# Altium PCB BugBuster_HAT.PcbDoc (part 1 of 3)
Units mm, origin at the board's own origin, x right, y up, seen from the top; angles counter-clockwise.
Board outline 110 x 80 mm, 4 copper layers (Top Layer, Mid Layer 1, Mid Layer 2, Bottom Layer), stack 1.17 mm thick; 116 components, 99 nets, 522 pads, 1540 vias.
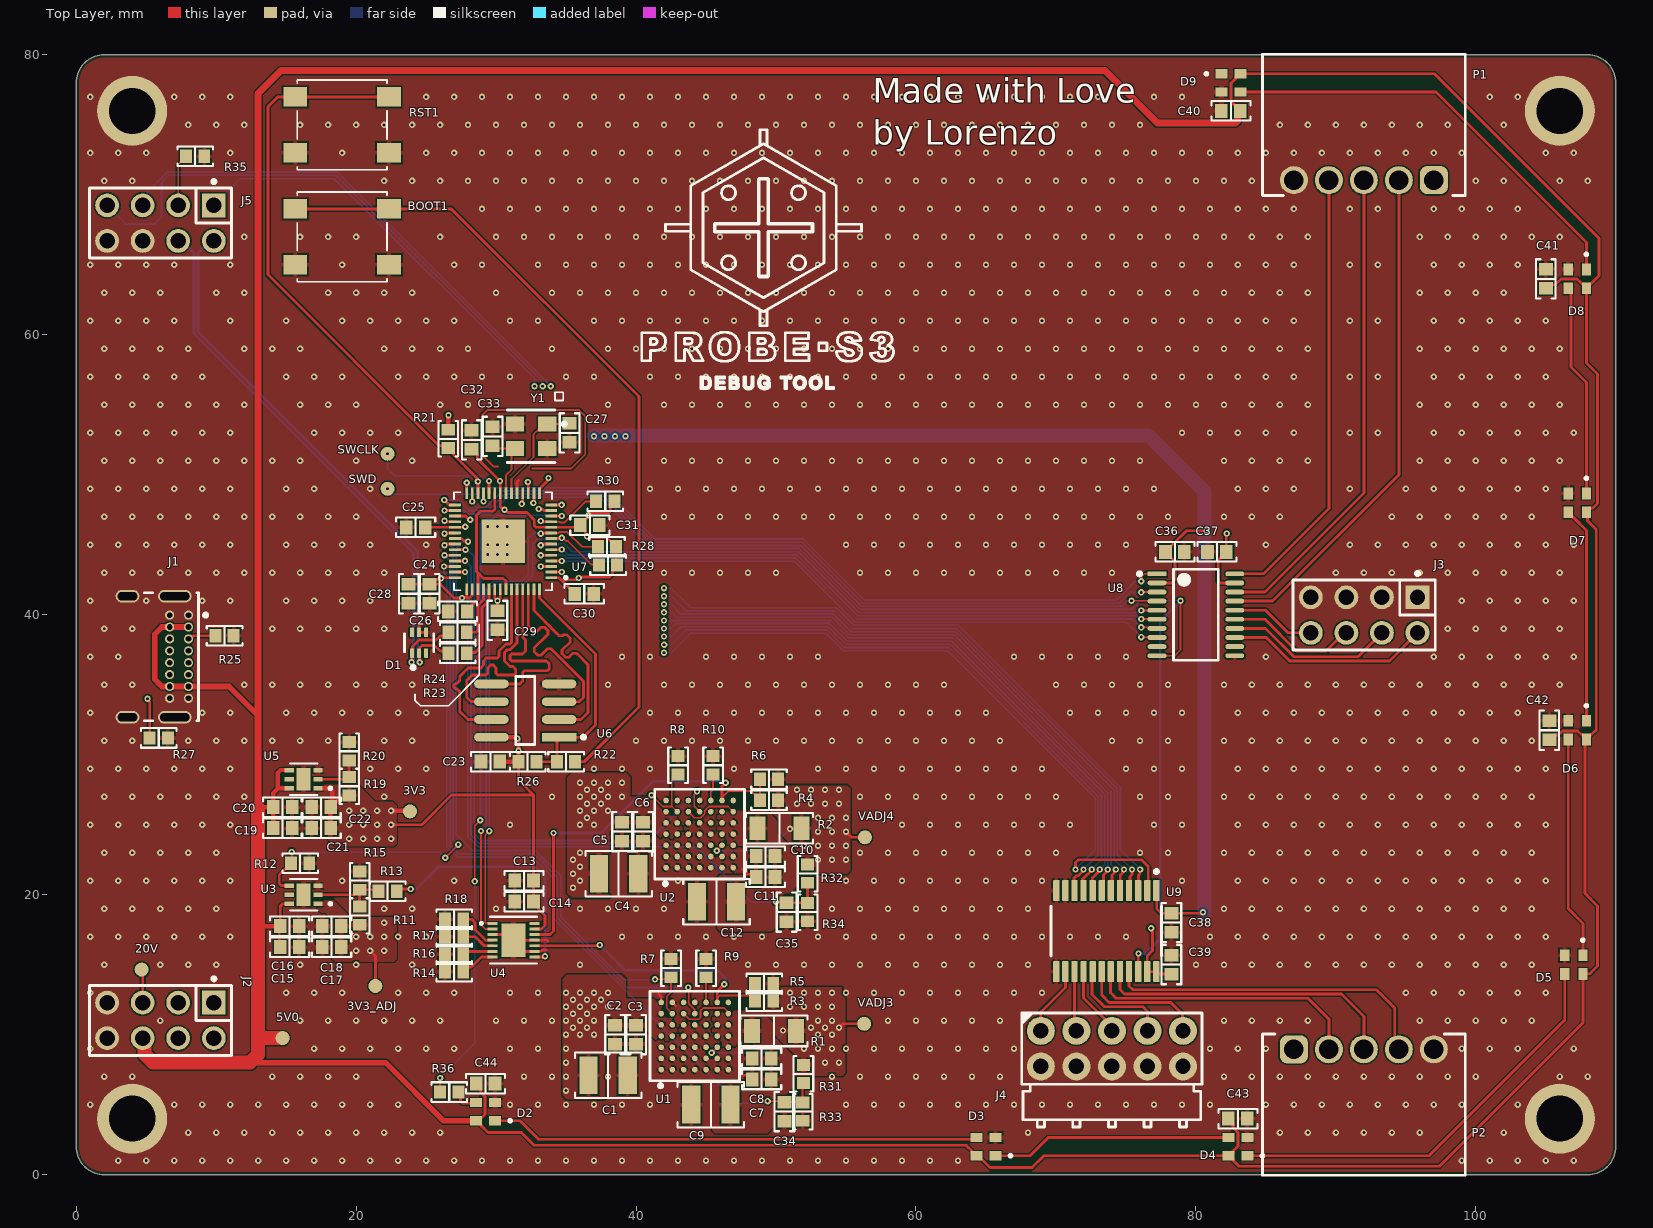
[diagram p0: Top Layer view]
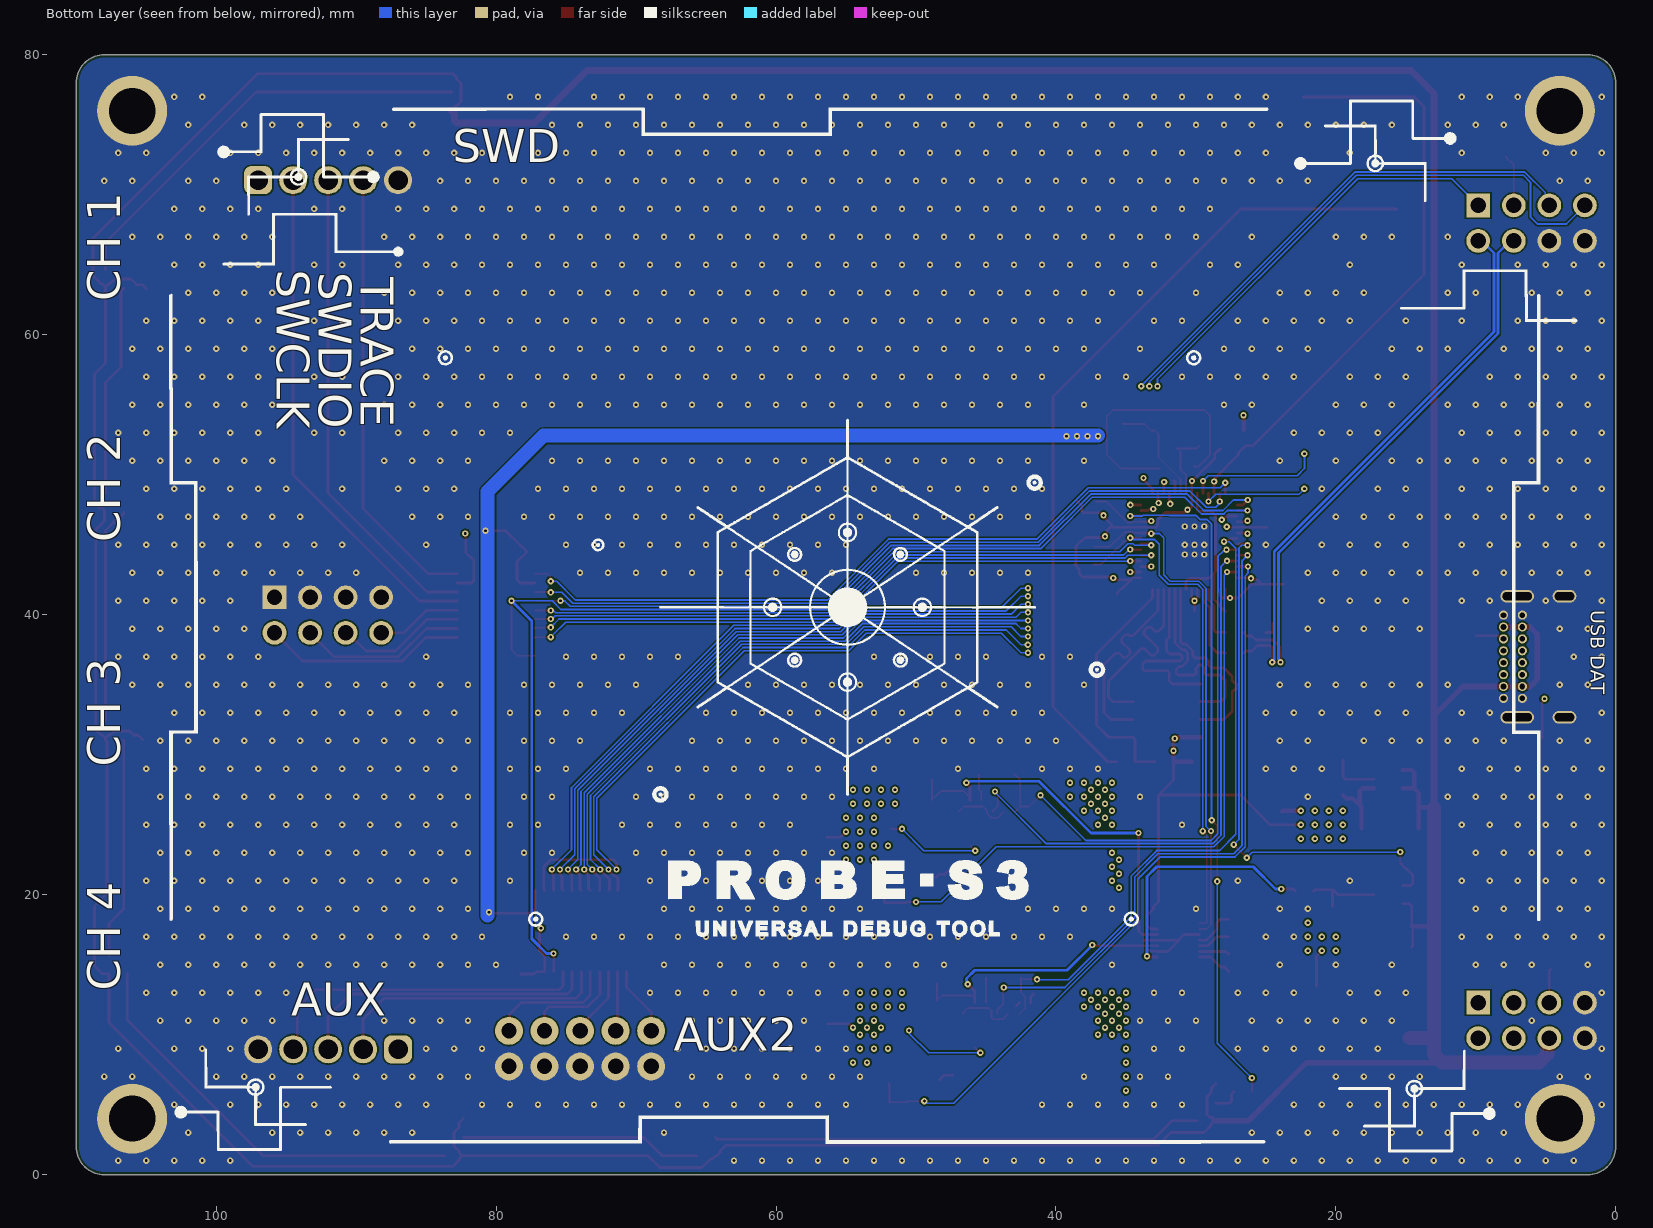
[diagram p1: Bottom Layer view, seen from below]
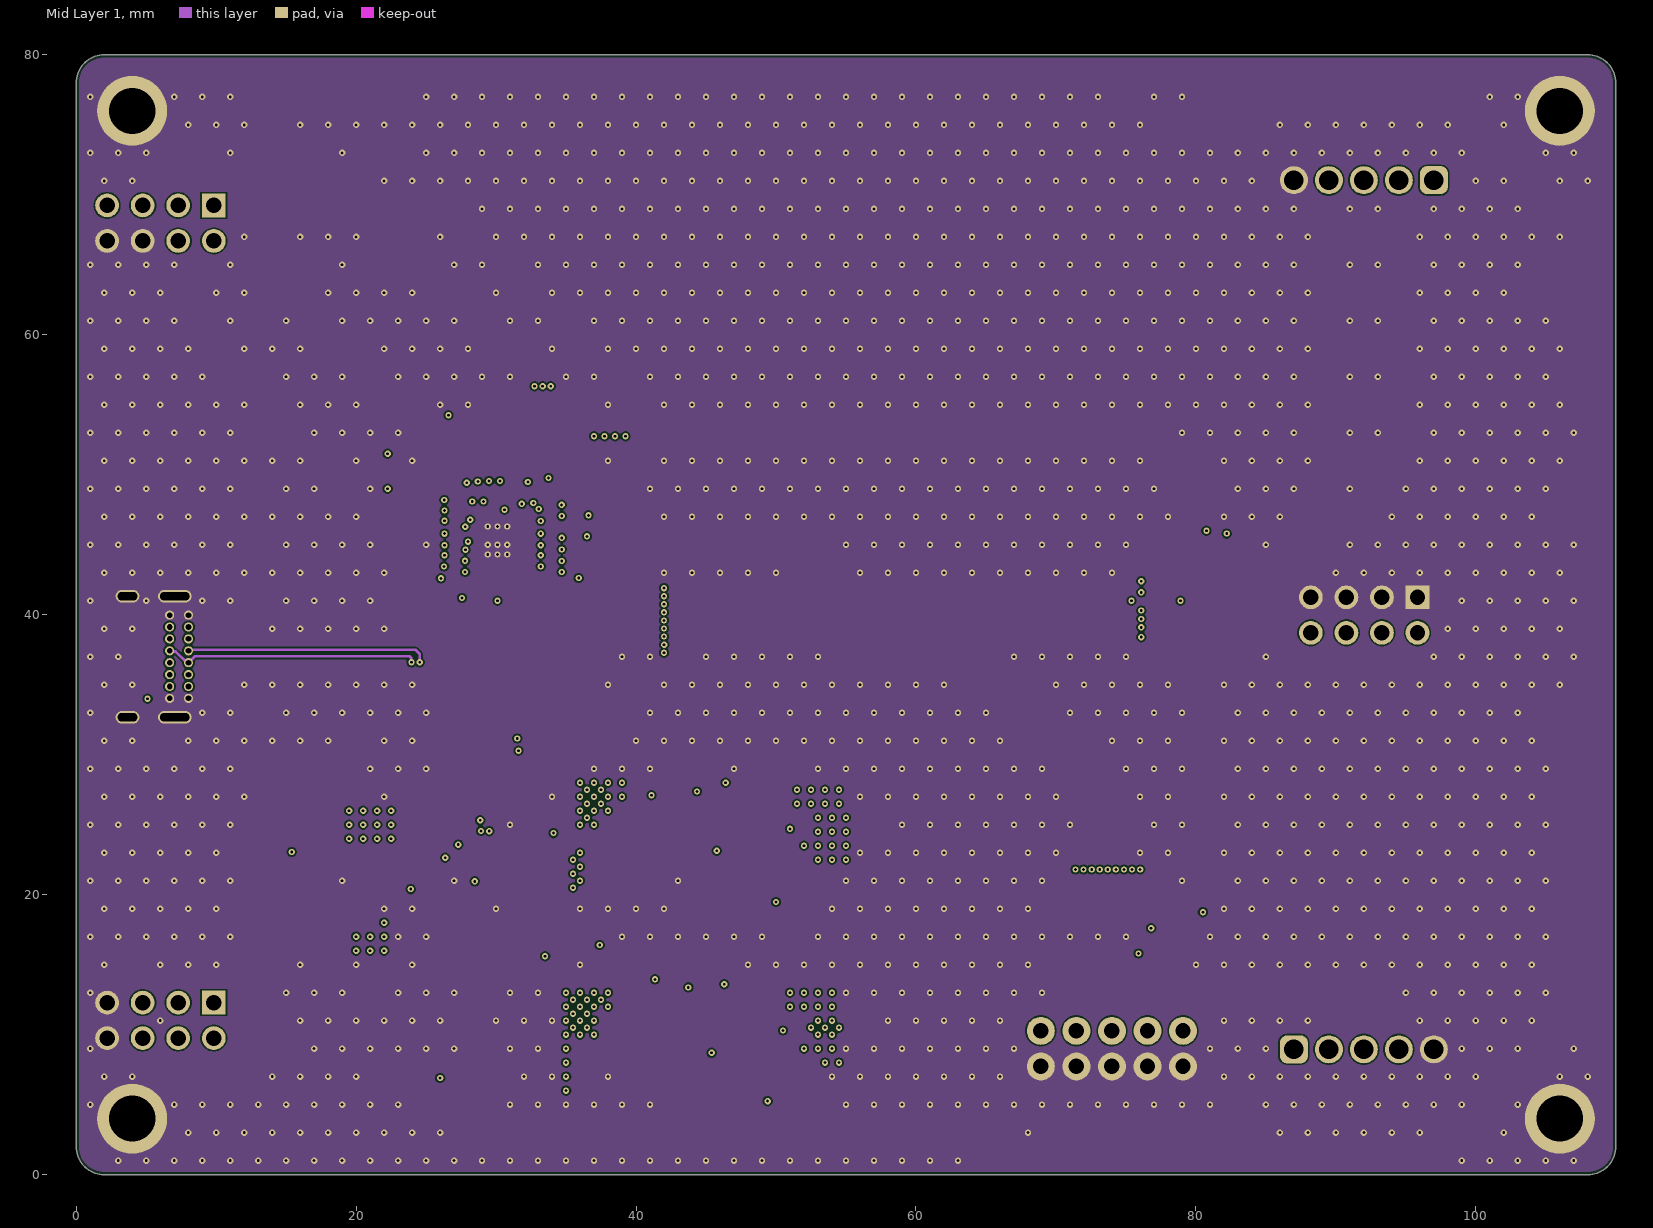
[diagram p2: Mid Layer 1]
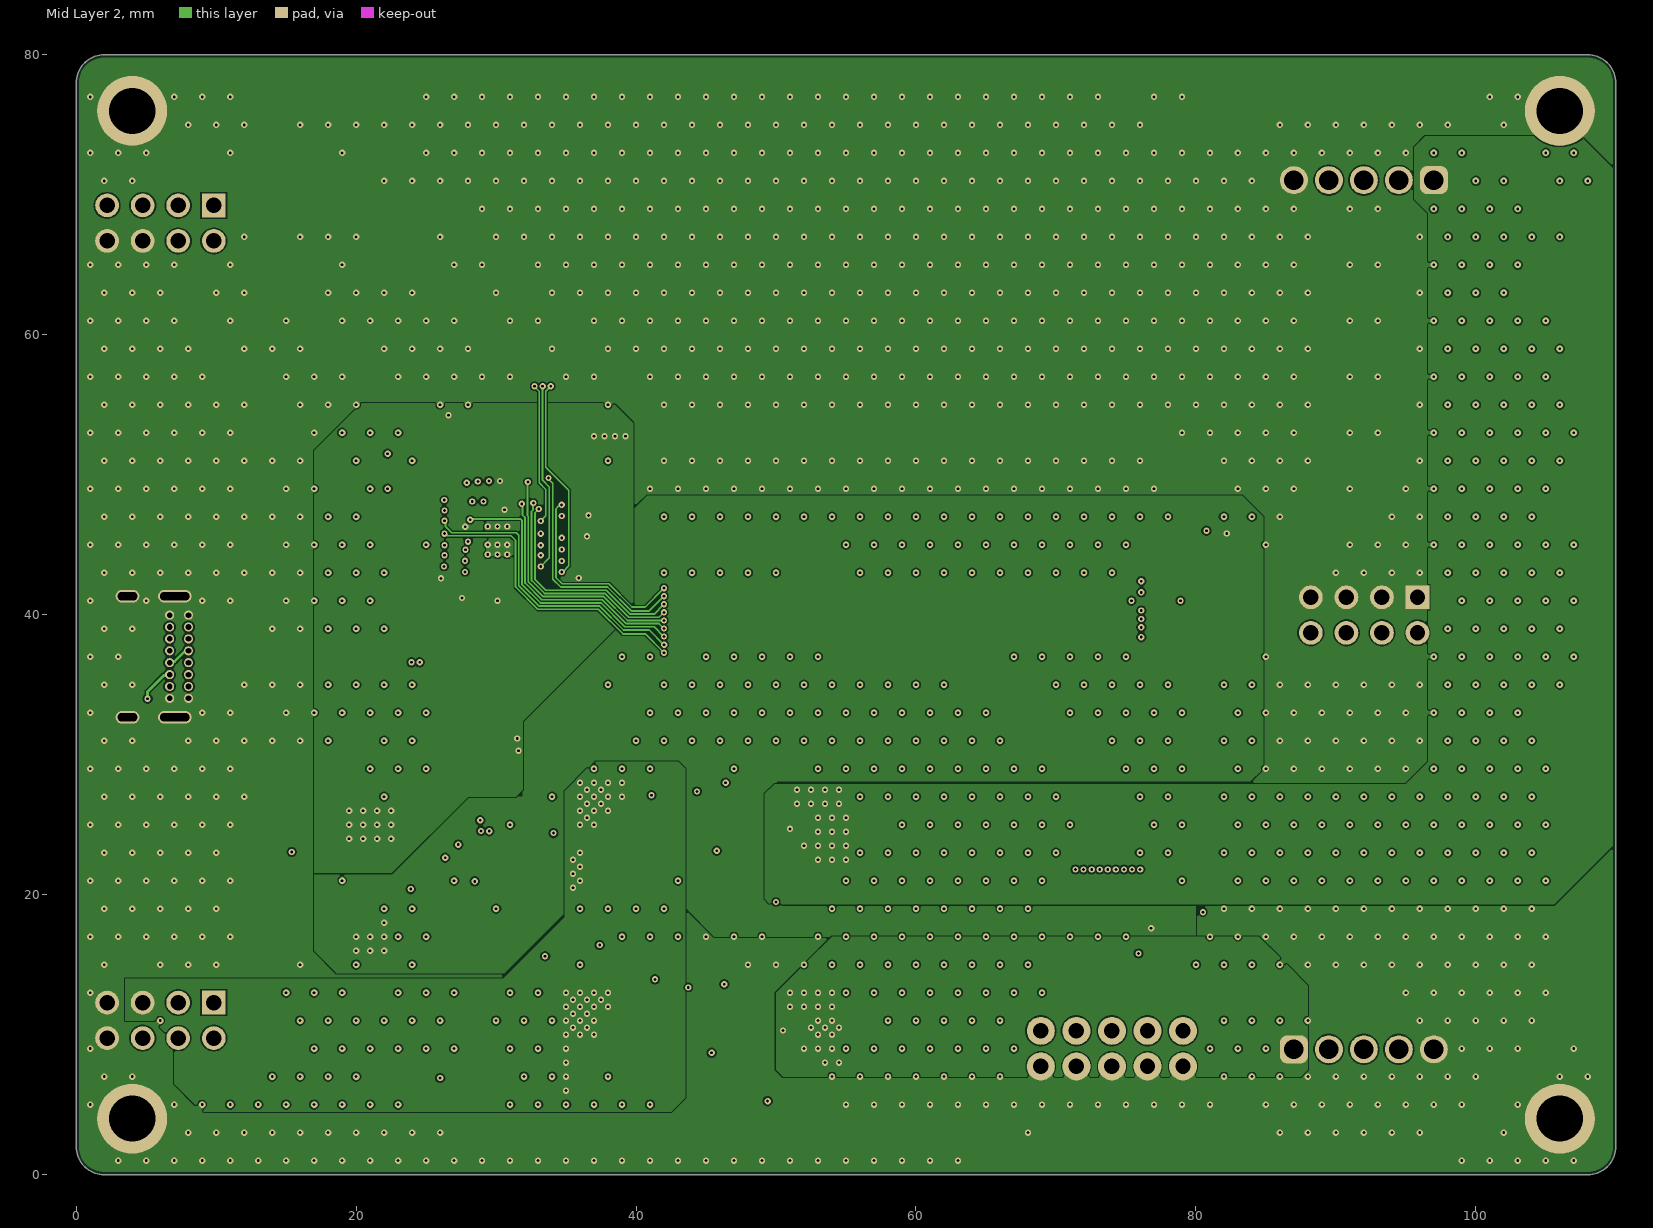
[diagram p3: Mid Layer 2]
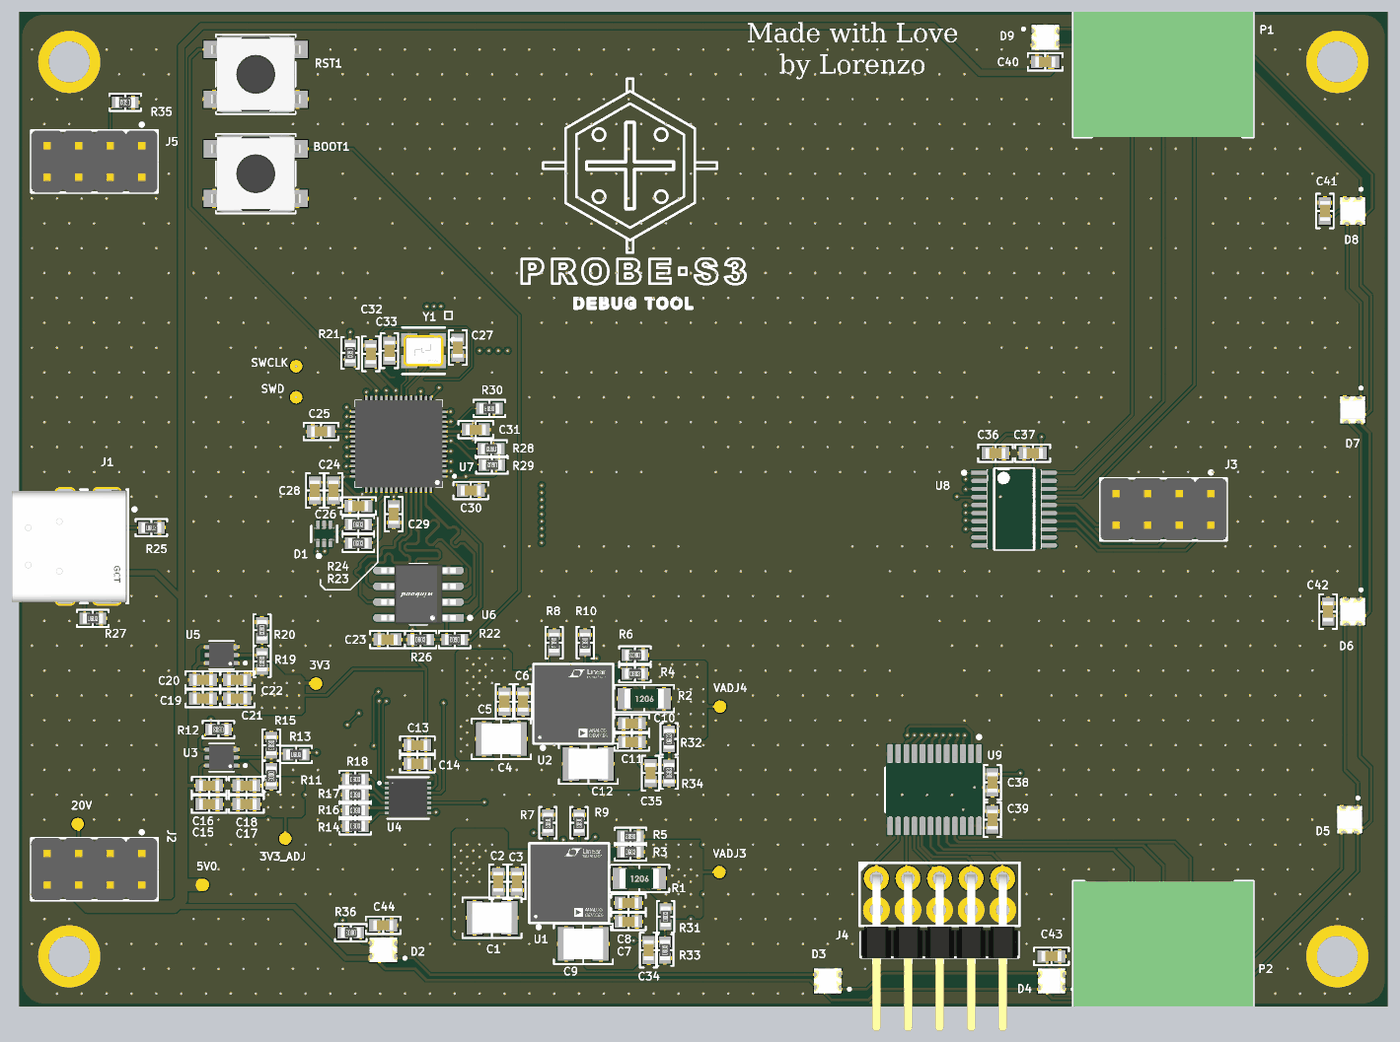
[diagram p5: 3D render of the assembled board from above, using the file's embedded part models]

## Layer stack, top to bottom
Top Solder: solder mask 0.0127, Solder Resist, Dk 3.8
Top Layer: signal copper 0.035
Dielectric 1: prepreg 0.1, 2313, Dk 4.05
Mid Layer 1: signal copper 0.0175
Core: core 0.865, FR-4, Dk 4.5
Mid Layer 2: signal copper 0.0175
Dielectric 2: prepreg 0.1, 2313, Dk 4.05
Bottom Layer: signal copper 0.035
Bottom Solder: solder mask 0.0127, Solder Resist, Dk 3.8

## Board outline
108,80 cw(c108,78) 110,78 110,2 cw(c108,2) 108,0 2,0 cw(c2,2) 0,2 0,40 0,78 cw(c2,78) 2,80

## Design rules (kind name [scope] priority, off if disabled: settings)
BoardOutlineClearance [All] p1: gap=0.2 ignorepadtopadclearanceinfootprint=FALSE
Clearance "Stitching GND" [IsStitchingVia and InNet('GND') vs (IsVia and (Not IsStitchingVia)) Or IsPad] p1: gap=0.2 ignorepadtopadclearanceinfootprint=FALSE
Clearance [All] p2: gap=0.102 ignorepadtopadclearanceinfootprint=FALSE except(0.127: Arc-Via Track-Via SMDPad-Via THPad-Via Via-Via Via-Fill Via-Poly Via-Region Via-Text; 0.25: Arc-Hole Track-Hole SMDPad-Hole THPad-Hole Via-Hole Fill-Hole Poly-Hole Region-Hole Text-Hole)
ComponentClearance [All] p1: gap=0.102 collisioncheckmode=3 verticalgap=0.102 showdistances=TRUE
DiffPairsRouting [All] p1: maxlimit=0.102 minlimit=0.102 mostfreqgap=0.102 toplayer_minwidth=0.102 toplayer_maxwidth=1816.048 toplayer_prefwidth=0.102 midlayer1_minwidth=0.102 midlayer1_maxwidth=1816.048 midlayer1_prefwidth=0.102 midlayer2_minwidth=0.102 midlayer2_maxwidth=1816.048 midlayer2_prefwidth=0.102 bottomlayer_minwidth=0.102 bottomlayer_maxwidth=1816.048 bottomlayer_prefwidth=0.102 maxuncoupledlength=12.7
Height [All] p1: minheight=0 maxheight=1816.048 prefheight=12.7
HoleSize [All] p1: absolutevalues=TRUE maxlimit=6.3 minlimit=0.2 maxpercent=80.000 minpercent=20.000
HoleToHoleClearance [All] p1: gap=0.25 allowstackedmicrovias=FALSE
MinimumAnnularRing [All] p1: minimumring=0.076
MinimumSolderMaskSliver [All] p1: minsoldermaskwidth=0
PlaneClearance [All] p1: clearance=0.102
PlaneConnect PlaneConnectPowerPads [InPadClass('PowerPads')] p1: planeconnectstyle=Direct reliefexpansion=0.508 reliefentries=4 reliefconductorwidth=0.254 reliefairgap=0.254
PlaneConnect [All] p2: pad.planeconnectstyle=Relief pad.reliefexpansion=0.3 pad.reliefentries=4 pad.reliefconductorwidth=0.102 pad.reliefairgap=0.102 via.planeconnectstyle=Direct via.reliefexpansion=0.3 via.reliefentries=4 via.reliefconductorwidth=0.127 via.reliefairgap=0.127
PolygonConnect PolygonConnectPowerPads [InNetClass('PowerNets')] p1: thpad.connectstyle=Direct thpad.reliefconductorwidth=0.254 thpad.reliefentries=4 thpad.polygonreliefangle="90 Angle" thpad.airgapwidth=0.254 smdpad.connectstyle=Relief smdpad.reliefconductorwidth=0.3 smdpad.reliefentries=4 smdpad.polygonreliefangle="90 Angle" smdpad.airgapwidth=0.12 smdpad.conductorbypadedge=TRUE smdpad.mindistance=0.381 smdpad.enablemindistance=FALSE via.connectstyle=Direct via.reliefconductorwidth=0.254 via.reliefentries=4 via.polygonreliefangle="90 Angle" via.airgapwidth=0.254
PolygonConnect [All] p2: thpad.connectstyle=Relief thpad.reliefconductorwidth=0.102 thpad.reliefentries=4 thpad.polygonreliefangle="90 Angle" thpad.airgapwidth=0.102 smdpad.connectstyle=Relief smdpad.reliefconductorwidth=0.102 smdpad.reliefentries=4 smdpad.polygonreliefangle="90 Angle" smdpad.airgapwidth=0.102 via.connectstyle=Direct via.reliefconductorwidth=0.127 via.reliefentries=4 via.polygonreliefangle="90 Angle" via.airgapwidth=0.127
RoutingVias [All] p1: holewidth=0.2 width=0.45 viastyle="Through Hole" minholewidth=0.2 minwidth=0.45 maxholewidth=6.3 maxwidth=6.55
SilkToSilkClearance [All] p1: silktosilkclearance=0
SilkToSolderMaskClearance [IsPad] p1: minsilkscreentomaskgap=0.102 clearancetoexposedcopper=TRUE
SolderMaskExpansion [All] p1: expansion=0.075 istentingtop=FALSE
SupplyNets "Schematic Supply Nets_11" [InNet('3V3')] p1: voltage=0.000
SupplyNets "Schematic Supply Nets_10" [InNet('ISN1')] p2: voltage=0.000
SupplyNets "Schematic Supply Nets_9" [InNet('+15V_ANA')] p3: voltage=0.000
SupplyNets "Schematic Supply Nets_8" [InNet('GND')] p4: voltage=0.000
SupplyNets "Schematic Supply Nets_7" [InNet('ISN2')] p5: voltage=0.000
SupplyNets "Schematic Supply Nets_6" [InNet('5V_BUCK')] p6: voltage=0.000
SupplyNets "Schematic Supply Nets_5" [InNet('3V3_ADJ')] p7: voltage=0.000
SupplyNets "Schematic Supply Nets_4" [InNet('-15V_ANA')] p8: voltage=0.000
SupplyNets "Schematic Supply Nets_3" [InNet('VADJ2_BUCK')] p9: voltage=0.000
SupplyNets "Schematic Supply Nets_2" [InNet('VADJ1_BUCK')] p10: voltage=0.000
SupplyNets "Schematic Supply Nets_1" [InNet('20V_USB')] p11: voltage=0.000
SupplyNets "Schematic Supply Nets" [InNet('1V1')] p12: voltage=0.000
Width [All] p1: maxlimit=1816.048 minlimit=0.102 preferedwidth=0.102
20 further rules are at their usual default settings.

## Classes and differential pairs
component class RP2040: 3V3 BOOT1 C23 C24 C25 C26 C27 C28 C29 C30 C31 C32 C33 C34 C35 D1 J1 R21 R22 R23 R24 R25 R26 R27 R28 R29 R30 R31 R32 R33 R34 RST1 SWCLK SWD U6 U7 Y1
net class PowerNets: 3V3 3V3_ADJ 5V_BUCK 20V_USB GND ISN1 ISN2 ISP1 ISP2
differential pair class USBDIFF: USB_DF1 USB_DF2 USB_UP
component class Power: 3V3_ADJ 20V C1 C2 C3 C4 C5 C6 C7 C8 C9 C10 C11 C12 C13 C14 C15 C16 C17 C18 C19 C20 C21 C22 R1 R2 R3 R4 R5 R6 R7 R8 R9 R10 R11 R12 R13 R14 R15 R16 R17 R18 R19 R20 U1 U2 U3 U4 U5 VADJ3 VADJ4
component class IOs: 5V0 C36 C37 C38 C39 C40 C41 C42 C43 C44 D2 D3 D4 D5 D6 D7 D8 D9 J2 J3 J4 J5 P1 P2 R35 R36 U8 U9
differential pair USB_DF2: +USB_DF2_P -USB_DF2_N

## Components (designator, comment, footprint, x,y, rotation, side; value= is the part's Value field where it differs from the comment)
3V3 "TP_SMD_1" TP_1.0mm 23.85,25.95 r180 top
3V3_ADJ "TP_SMD_1" TP_1.0mm 21.375,13.475 r180 top
5V0 "TP_SMD_1" TP_1.0mm 14.75,9.75 r180 top
20V "TP_SMD_1" TP_1.0mm 4.675,14.65 r180 top
BOOT1 "430473035826" 430473035826 19,67 r180 top
C1 "10 µF" "CAP 1210_3225 - 1MM" 38,7.1 r180 top
C2 "1 µF" "CAP 0603_1608" 38.5,10 r90 top
C3 "0.1 µF" "CAP 0603_1608" 40,10 r90 top
C4 "10 µF" "CAP 1210_3225 - 1MM" 38.75,21.5 r180 top
C5 "1 µF" "CAP 0603_1608" 39,24.5 r90 top
C6 "0.1 µF" "CAP 0603_1608" 40.5,24.5 r90 top
C7 "0.1 µF" "CAP 0603_1608" 48.975,6.8 r0 top
C8 "1 µF" "CAP 0603_1608" 48.975,8.3 r0 top
C9 "10 µF" "CAP 1210_3225 - 1MM" 45.35,5 r0 top
C10 "0.1 µF" "CAP 0603_1608" 49.25,22.75 r0 top
C11 "1 µF" "CAP 0603_1608" 49.25,21.25 r0 top
C12 "10 µF" "CAP 1210_3225 - 1MM" 45.75,19.5 r0 top
C13 "1 µF" "CAP 0603_1608" 32,21 r0 top
C14 "1000 pF" "CAP 0603_1608" 32,19.5 r0 top
C15 "1 µF" "CAP 0603_1608" 15.25,16.25 r180 top
C16 "1000 pF" "CAP 0603_1608" 15.25,17.75 r180 top
C17 "1 µF" "CAP 0603_1608" 18.25,16.25 r0 top
C18 "1000 pF" "CAP 0603_1608" 18.25,17.75 r0 top
C19 "1 µF" "CAP 0603_1608" 14.75,24.75 r180 top
C20 "1000 pF" "CAP 0603_1608" 14.75,26.25 r180 top
C21 "1 µF" "CAP 0603_1608" 17.5,24.75 r0 top
C22 "1000 pF" "CAP 0603_1608" 17.5,26.25 r0 top
C23 "0.1 µF" "CAP 0603_1608" 29.6,29.5 r0 top
C24 "1 µF" "CAP 0603_1608" 25.25,41.5 r90 top
C25 "10 µF" "CAP 0603_1608" 24.25,46.25 r0 top
C26 "1 µF" "CAP 0603_1608" 27.25,40.25 r0 top
C27 "33 pF" "CAP 0603_1608" 35.25,53 r90 top
C28 "0.1 µF" "CAP 0603_1608" 23.75,41.5 r90 top
C29 "0.1 µF" "CAP 0603_1608" 30.1,39.6 r90 top
C30 "0.1 µF" "CAP 0603_1608" 36.3,41.5 r180 top
C31 "0.1 µF" "CAP 0603_1608" 36.7,46.4 r180 top
C32 "0.1 µF" "CAP 0603_1608" 28.25,52.5 r270 top
C33 "33 pF" "CAP 0603_1608" 29.75,52.75 r270 top
C34 "0.1 µF" "CAP 0603_1608" 50.6,4.5 r90 top
C35 "0.1 µF" "CAP 0603_1608" 50.75,18.75 r90 top
C36 "0.1 µF" "CAP 0603_1608" 78.5,44.5 r180 top
C37 "0.1 µF" "CAP 0603_1608" 81.5,44.5 r0 top
C38 "0.1 µF" "CAP 0603_1608" 78.25,18 r90 top
C39 "0.1 µF" "CAP 0603_1608" 78.25,15 r270 top
C40 "0.1 µF" "CAP 0603_1608" 82.5,76 r0 top
C41 "0.1 µF" "CAP 0603_1608" 105,64 r270 top
C42 "0.1 µF" "CAP 0603_1608" 105.25,31.75 r270 top
C43 "0.1 µF" "CAP 0603_1608" 83,4 r180 top
C44 "0.1 µF" "CAP 0603_1608" 29.25,6.5 r180 top
D1 "TPD2E1B06DRLR" FP-DRL0006A-MFG 24.5,38 r90 top
D2 "XL-2020RGBC-WS2812B" LED_XL-2020RGBC-WS2812B 29.25,4.5 r180 top
D3 "XL-2020RGBC-WS2812B" LED_XL-2020RGBC-WS2812B 65,2 r180 top
D4 "XL-2020RGBC-WS2812B" LED_XL-2020RGBC-WS2812B 83,2 r180 top
D5 "XL-2020RGBC-WS2812B" LED_XL-2020RGBC-WS2812B 107,15 r270 top
D6 "XL-2020RGBC-WS2812B" LED_XL-2020RGBC-WS2812B 107.25,31.75 r270 top
D7 "XL-2020RGBC-WS2812B" LED_XL-2020RGBC-WS2812B 107.25,48 r270 top
D8 "XL-2020RGBC-WS2812B" LED_XL-2020RGBC-WS2812B 107.25,64 r270 top
D9 "XL-2020RGBC-WS2812B" LED_XL-2020RGBC-WS2812B 82.5,78 r0 top
J1 "USB4085-GF-A" FP-USB4085-GF-A-MFG 4,37 r270 top
J2 "PR20204VBDN" FP-PR20204VBDN-MFG 6.02,11.02 r180 top
J3 "PR20204VBDN" FP-PR20204VBDN-MFG 92.02,39.98 r180 top
J4 "M20-9740542" "HARWIN M20-9740545" 74,9 r0 top
J5 "PR20204VBDN" FP-PR20204VBDN-MFG 6.02,67.98 r180 top
P1 "691382010005" 691382010005 92,75 r180 top
P2 "691382010005" 691382010005 92,5 r0 top
R1 "50 mOhms" "STACKPOLE CSR1206" 49.857,10.27 r0 top
R2 "50 mOhms" "STACKPOLE CSR1206" 50.25,24.75 r0 top
R3 "100 kOhms" "RES 0603_1608" 49.15,12.4 r0 top
R4 "100 kOhms" "RES 0603_1608" 49.5,26.75 r0 top
R5 "5.62 kOhms" "RES 0603_1608" 49.15,13.65 r180 top
R6 "5.62 kOhms" "RES 0603_1608" 49.5,28.25 r180 top
R7 "100 kOhms" "RES 0603_1608" 42.5,14.75 r270 top
R8 "100 kOhms" "RES 0603_1608" 43,29.25 r270 top
R9 "41.7 kOhms" "RES 0603_1608" 45,14.75 r270 top
R10 "41.7 kOhms" "RES 0603_1608" 45.5,29.25 r270 top
R11 "34.8 kOhms" "RES 0603_1608" 20.25,18.5 r270 top
R12 "100 kOhms" "RES 0603_1608" 16,22.25 r180 top
R13 "=Value" "RES 0603_1608" 22.25,20.25 r0 top
R14 "154 kOhms" "RES 0603_1608" 27,14.5 r0 top
R15 "6.98 kOhms" "RES 0603_1608" 20.25,21 r270 top
R16 "44.2 kOhms" "RES 0603_1608" 27,15.75 r180 top
R17 "44.2 kOhms" "RES 0603_1608" 27,17 r180 top
R18 "154 kOhms" "RES 0603_1608" 27,18.25 r0 top
R19 "34.8 kOhms" "RES 0603_1608" 19.5,27.75 r270 top
R20 "6.98 kOhms" "RES 0603_1608" 19.5,30.25 r270 top
R21 "10 kOhms" "RES 0603_1608" 26.584,52.568 r270 top
R22 "1 kOhms" "RES 0603_1608" 35,29.5 r180 top
R23 "27 Ohms" "RES 0603_1608" 27.25,37.25 r0 top
R24 "27 Ohms" "RES 0603_1608" 27.25,38.75 r0 top
R25 "5.1 kOhms" "RES 0603_1608" 10.6,38.5 r0 top
R26 "10 kOhms" "RES 0603_1608" 32.25,29.5 r0 top
R27 "5.1 kOhms" "RES 0603_1608" 5.9,31.2 r0 top
R28 "10 kOhms" "RES 0603_1608" 37.925,44.85 r180 top
R29 "10 kOhms" "RES 0603_1608" 38,43.55 r180 top
R30 "10 kOhms" "RES 0603_1608" 37.8,48.1 r180 top
R31 "110 kOhms" "RES 0603_1608" 51.959,7.194 r90 top
R32 "110 kOhms" "RES 0603_1608" 52.25,21.5 r90 top
R33 "10 kOhms" "RES 0603_1608" 51.9,4.5 r90 top
R34 "10 kOhms" "RES 0603_1608" 52.25,18.75 r90 top
R35 "10 kOhms" "RES 0603_1608" 8.5,72.75 r180 top
R36 "1 kOhms" "RES 0603_1608" 26.65,5.9 r180 top
RST1 "430473035826" 430473035826 19,75 r180 top
SWCLK "TP_SMD_1" TP_1.0mm 22.25,51.5 r270 top
SWD "TP_SMD_1" TP_1.0mm 22.25,49 r180 top
U1 "LTM8083IY#PBF" FP-BGA-49-05-08-1518-MFG 44.2,9.9 r90 top
U2 "LTM8083IY#PBF" FP-BGA-49-05-08-1518-MFG 44.542,24.329 r90 top
U3 "TPS74601PDRVT" SON65P200X200X80-7N 16.25,20 r180 top
U4 "DS4424+" 21-0137_T1433+2_MXM 31.249,16.75 r0 top
U5 "TPS74601PDRVT" SON65P200X200X80-7N 16.25,28.25 r180 top
U6 "W25Q16JVSNIQ TR" FP-W25Q16JVSNIQ_TR-IPC_A 32.084,33.155 r180 top
U7 "RP2040" QFN40P700X700X90-57N 30.5,45.25 r180 top
U8 "TXS0108W-Q1" FP-PW0020A-IPC_C 80,40 r0 top
U9 "SN74LVC8T245PWR" FP-PW0024A-MFG 73.6,17.4 r270 top
VADJ3 "TP_SMD_1" TP_1.0mm 56.3,10.775 r270 top
VADJ4 "TP_SMD_1" TP_1.0mm 56.35,24.1 r270 top
Y1 "ABM8-12.000MHZ-20-B1U-T" FP-ABM8-MFG 32.5,52.75 r180 top

## Footprints (in the part's own frame and the unit in brackets; to place one, negate y for a bottom-side part, rotate by r counter-clockwise, add the part's x,y. Pads: shape width x height; smd on the part's side, far side on the other; paste and mask are expansions set on the pad)
21-0137_T1433+2_MXM [mil]
  rect 28x8 smd paste+0 mask+0: 1(-59,47.24) 2(-59,31.5) 3(-59,15.75) 4(-59,0) 5(-59,-15.75) 6(-59,-31.5) 7(-59,-47.24) 8(59,-47.24) 9(59,-31.5) 10(59,-15.75) 11(59,0) 12(59,15.75) 13(59,31.5) 14(59,47.24)
  rect 67x94 smd paste+0 mask+0: 15(0,0)
  silkscreen extent -95,-66 66,66, body extent -61,-61 61,61, height 32
430473035826 [mm] "SMD Tact Switch, body 6x6mm"
  rect 1.7x1.4 smd: A1(-3.35,2) A2(3.35,2) B1(-3.35,-2) B2(3.35,-2)
  silkscreen extent -3.2,-3.2 3.2,3.2, body extent -3.6,-3.1 3.6,3.1, height 3.5
691382010005 [mm] "Horizontal PCB Header, pitch 2.5mm, 05p"
  rrect50% 2x2 hole 1.4: 1(-5,3.95)
  round 2 hole 1.4: 2(-2.5,3.95) 3(0,3.95) 4(2.5,3.95) 5(5,3.95)
  silkscreen extent -7.25,-5.05 7.25,5.05, body extent -7.25,-5.05 7.25,5.05, height 8.15
"CAP 0603_1608" [mm] "Chip Capacitor, 2-Leads, Body 1.60x0.80mm, IPC Medium Density"
  rect 0.9x1 smd: 1(-0.675,0) 2(0.675,0)
  silkscreen extent -1.4,-0.7 1.4,0.7, body extent -0.8,-0.41 0.8,0.41, height 0.82
"CAP 1210_3225 - 1MM" [mm] "Chip Capacitor, 2-Leads, Body 3.20x2.50mm, IPC Medium Density"
  rect 1.3x2.7 smd: 1(-1.4,0) 2(1.4,0)
  silkscreen extent -2.37,-1.63 2.37,1.63, body extent -1.6,-1.25 1.6,1.25, height 1
FP-ABM8-MFG [mm]
  rect 1.3x1.05 smd paste+0 mask+0: 1(-1.15,-0.875) 2(1.15,-0.875) 3(1.15,0.875) 4(-1.15,0.875)
  silkscreen extent -2.5,-1.88 1.7,1.88, body extent -1.9,-1.5 1.9,1.5, height 0.25
FP-BGA-49-05-08-1518-MFG [mm]
  round 0.4 smd paste+0 mask+0: A1(-2.4,2.4) A2(-1.6,2.4) A3(-0.8,2.4) A4(0,2.4) A5(0.8,2.4) A6(1.6,2.4) A7(2.4,2.4) B1(-2.4,1.6) B2(-1.6,1.6) B3(-0.8,1.6) B4(0,1.6) B5(0.8,1.6) B6(1.6,1.6) B7(2.4,1.6) C1(-2.4,0.8) C2(-1.6,0.8) C3(-0.8,0.8) C4(0,0.8) C5(0.8,0.8) C6(1.6,0.8) C7(2.4,0.8) D1(-2.4,0) D2(-1.6,0) D3(-0.8,0) D4(0,0) D5(0.8,0) D6(1.6,0) D7(2.4,0) E1(-2.4,-0.8) E2(-1.6,-0.8) E3(-0.8,-0.8) E4(0,-0.8) E5(0.8,-0.8) E6(1.6,-0.8) E7(2.4,-0.8) F1(-2.4,-1.6) F2(-1.6,-1.6) F3(-0.8,-1.6) F4(0,-1.6) F5(0.8,-1.6) F6(1.6,-1.6) F7(2.4,-1.6) G1(-2.4,-2.4) G2(-1.6,-2.4) G3(-0.8,-2.4) G4(0,-2.4) G5(0.8,-2.4) G6(1.6,-2.4) G7(2.4,-2.4)
  silkscreen extent -3.67,-3.2 3.2,3.2, body extent -3.7,-3.7 3.7,3.7, height 0.25
FP-DRL0006A-MFG [mm]
  rrect33% 0.67x0.3 smd paste+0 mask+0: 1(-0.74,0.5) 2(-0.74,0) 3(-0.74,-0.5) 4(0.74,-0.5) 5(0.74,0) 6(0.74,0.5)
  silkscreen extent -1.9,-1.05 0.65,1.05, body extent -1.17,-1.1 1.17,1.1, height 0.25
FP-PR20204VBDN-MFG [mm]
  rect 1.7x1.7 hole 1.1 paste-2539.97 mask+0: 1(-3.81,-1.27)
  round 1.7 hole 1.1 paste-2539.97 mask+0: 2(-3.81,1.27) 3(-1.27,-1.27) 4(-1.27,1.27) 5(1.27,-1.27) 6(1.27,1.27) 7(3.81,-1.27) 8(3.81,1.27)
  silkscreen extent -5.08,-3.09 5.08,2.5, body extent -5.18,-2.6 5.18,2.6, height 0.25
FP-PW0020A-IPC_C [mm]
  rect 1.355x0.341 smd paste+0 mask+0: 1(-2.775,2.925)
  rrect100% 1.355x0.341 smd paste+0 mask+0: 2(-2.775,2.275) 3(-2.775,1.625) 4(-2.775,0.975) 5(-2.775,0.325) 6(-2.775,-0.325) 7(-2.775,-0.975) 8(-2.775,-1.625) 9(-2.775,-2.275) 10(-2.775,-2.925) 11(2.775,-2.925) 12(2.775,-2.275) 13(2.775,-1.625) 14(2.775,-0.975) 15(2.775,-0.325) 16(2.775,0.325) 17(2.775,0.975) 18(2.775,1.625) 19(2.775,2.275) 20(2.775,2.925)
  silkscreen extent -4.15,-3.25 1.6,3.25, body extent -3.55,-3.35 3.55,3.35, height 0.25
FP-PW0024A-MFG [mm]
  rrect22% 1.5x0.45 smd paste+0 mask+0: 1(-2.9,3.575) 2(-2.9,2.925) 3(-2.9,2.275) 4(-2.9,1.625) 5(-2.9,0.975) 6(-2.9,0.325) 7(-2.9,-0.325) 8(-2.9,-0.975) 9(-2.9,-1.625) 10(-2.9,-2.275) 11(-2.9,-2.925) 12(-2.9,-3.575) 13(2.9,-3.575) 14(2.9,-2.925) 15(2.9,-2.275) 16(2.9,-1.625) 17(2.9,-0.975) 18(2.9,-0.325) 19(2.9,0.325) 20(2.9,0.975) 21(2.9,1.625) 22(2.9,2.275) 23(2.9,2.925) 24(2.9,3.575)
  silkscreen extent -4.37,-3.95 1.78,3.95, body extent -3.75,-4.2 3.75,4.2, height 0.25
FP-USB4085-GF-A-MFG [mm]
  rrect100% 0.9x2.4 hole 2.1 slot 0.6 at 0 deg paste-2539.97 mask+0: 1(-4.325,3.045) 2(4.325,3.045)
  rrect100% 0.9x1.7 hole 1.4 slot 0.6 at 0 deg paste-2539.97 mask+0: 3(-4.325,-0.335) 4(4.325,-0.335)
  round 0.65 hole 0.4 paste-2539.97 mask+0: A1(-2.975,4.025) A4(-2.125,4.025) A5(-1.275,4.025) A6(-0.425,4.025) A7(0.425,4.025) A8(1.275,4.025) A9(2.125,4.025) A12(2.975,4.025) B1(2.975,2.675) B4(2.125,2.675) B5(1.275,2.675) B6(0.425,2.675) B7(-0.425,2.675) B8(-1.275,2.675) B9(-2.125,2.675) B12(-2.975,2.675)
  silkscreen extent -4.57,0.89 4.57,5.37, body extent -4.87,-4.83 4.87,4.83, height 0.25
FP-W25Q16JVSNIQ_TR-IPC_A [mm]
  rect 2.474x0.623 smd paste+0 mask+0: 1(-2.416,1.905)
  rrect100% 2.474x0.623 smd paste+0 mask+0: 2(-2.416,0.635) 3(-2.416,-0.635) 4(-2.416,-1.905) 5(2.416,-1.905) 6(2.416,-0.635) 7(2.416,0.635) 8(2.416,1.905)
  silkscreen extent -4.28,-2.42 0.68,2.42, body extent -4.15,-2.93 4.15,2.93, height 0.25
"HARWIN M20-9740545" [mm] "2.54mm DIL PC TAIL PIN HEADER ASSEMBLY"
  round 2 hole 1.1: 1(-5.08,1.27) 2(-2.54,1.27) 3(0,1.27) 4(2.54,1.27) 5(5.08,1.27) 6(5.08,-1.27) 7(2.54,-1.27) 8(0,-1.27) 9(-2.54,-1.27) 10(-5.08,-1.27)
  silkscreen extent -6.46,-5.59 6.44,2.57, body extent -6.35,-10.97 6.35,1.59, height 5
LED_XL-2020RGBC-WS2812B [mm]
  rect 0.85x0.65 smd: 1(-0.675,0.65) 2(-0.675,-0.65) 3(0.675,-0.65) 4(0.675,0.65)
  silkscreen extent -1.85,0.55 -1.65,0.75, body extent -1.1,-1.02 1.1,0.98, height 0.84
QFN40P700X700X90-57N [mm]
  rrect25% 0.84x0.2 smd: 1(-3.435,2.6) 2(-3.435,2.2) 3(-3.435,1.8) 4(-3.435,1.4) 5(-3.435,1) 6(-3.435,0.6) 7(-3.435,0.2) 8(-3.435,-0.2) 9(-3.435,-0.6) 10(-3.435,-1) 11(-3.435,-1.4) 12(-3.435,-1.8) 13(-3.435,-2.2) 14(-3.435,-2.6) 29(3.435,-2.6) 30(3.435,-2.2) 31(3.435,-1.8) 32(3.435,-1.4) 33(3.435,-1) 34(3.435,-0.6) 35(3.435,-0.2) 36(3.435,0.2) 37(3.435,0.6) 38(3.435,1) 39(3.435,1.4) 40(3.435,1.8) 41(3.435,2.2) 42(3.435,2.6)
  rrect25% 0.2x0.84 smd: 15(-2.6,-3.435) 16(-2.2,-3.435) 17(-1.8,-3.435) 18(-1.4,-3.435) 19(-1,-3.435) 20(-0.6,-3.435) 21(-0.2,-3.435) 22(0.2,-3.435) 23(0.6,-3.435) 24(1,-3.435) 25(1.4,-3.435) 26(1.8,-3.435) 27(2.2,-3.435) 28(2.6,-3.435) 43(2.6,3.435) 44(2.2,3.435) 45(1.8,3.435) 46(1.4,3.435) 47(1,3.435) 48(0.6,3.435) 49(0.2,3.435) 50(-0.2,3.435) 51(-0.6,3.435) 52(-1,3.435) 53(-1.4,3.435) 54(-1.8,3.435) 55(-2.2,3.435) 56(-2.6,3.435)
  rect 3.1x3.1 smd paste-0.57: 57(0,0)
  silkscreen extent -4.57,-3.5 3.5,3.5, body extent -3.5,-3.5 3.5,3.5, height 0.9
"RES 0603_1608" [mm] "Chip Resistor, 2-Leads, Body 1.60x0.80mm, IPC Medium Density"
  rect 0.85x0.95 smd: 1(-0.65,0) 2(0.65,0)
  silkscreen extent -1.27,-0.7 1.27,0.7, body extent -0.8,-0.4 0.8,0.4, height 0.45
SON65P200X200X80-7N [mm]
  rect 0.66x0.32 smd: 1(-1.025,0.65) 2(-1.025,0) 3(-1.025,-0.65) 4(1.025,-0.65) 5(1.025,0) 6(1.025,0.65)
  rect 1x1.6 smd paste-2: 7(0,0)
  silkscreen extent -2.01,-1.13 1,1.13, body extent -1,-1 1,1, height 0.8
"STACKPOLE CSR1206" [mm] "Chip Resistor, 2-Leads, Body 3.13x1.55mm, IPC Medium Density"
  rect 1.15x1.7 smd: 1(-1.575,0) 2(1.575,0)
  silkscreen extent -2.4,-1.1 2.4,1.1, body extent -1.6,-0.78 1.6,0.77, height 0.55
TP_1.0mm [mm]
  round 1 smd paste-5: 1(0,0)

## Part data
BOOT1 RST1: library part CMP-1455-00006-5, "Switch Tactile Spst-no 0.05A 12V", Current Rating=50mA, Insulation Resistance=100MΩ, Max Operating Temperature=85°C, Min Operating Temperature=-40°C, Voltage Rating=12V, Actuator Material="Liquid Crystal Polymer, Polymer", Contact Plating=Silver, Height=3.5mm, Illumination Type=Non-Illuminated, Mechanical Life=500kcycles, Mount="Surface Mount", packaging="Tape and Reel", RoHS=Compliant, Switch Function=Off-Mom, Switch Travel=250µm, Throw Configuration=SPST
C1 C4 C9 C12: library part GMC32X5R106M50NT, "CAP1210 X5R 10UF 20% 50V", Device Package="1210 (3225 Metric)", manufacturer="Cal-Chip Electronics, Inc.", Operating Temperature="-55°C ~ 85°C", Supplier Part Number 1=4713-GMC32X5R106M50NTCT-ND, Temperature Coefficient=X5R, Tolerance=±20%, Voltage - Rated=50V, Applications="General Purpose", Capacitance="10 µF", componentlink1description=Datasheet, componentlink1url=https://calchip.com/wp-content/uploads/2023/05/gmc_series.pdf, componentlink2description="DigiKey Link", componentlink2url=https://www.digikey.com/en/products/detail/cal-chip-electronics-inc/GMC32X5R106M50NT/21802006, lastupdated="04/06/2024 19:20:41", Lifecycle Status=Active, Minimum Order=1, Mounting Type="Surface Mount, MLCC", Package / Case="1210 (3225 Metric)", packaging=TapeAndReel, Part Number=GMC32X5R106M50NT, partid=58255, price=0.13, series=GMC, Size / Dimension="0.126\" L x 0.098\" W (3.20mm x 2.50mm)", Supplier 1=DigiKey, Thickness (Max)="0.110\" (2.80mm)"
C2 C5 C8 C11 C13 C15 C17 C19 C21 C24 C26: library part C1608X5R1H105K080AB, "CAP CER 1UF 50V X5R 0603", Device Package="0603 (1608 Metric)", manufacturer="TDK Corporation", Operating Temperature="-55°C ~ 85°C", Supplier Part Number 1=445-7468-1-ND, Temperature Coefficient=X5R, Tolerance=±10%, Voltage - Rated=50V, Applications="General Purpose", Capacitance="1 µF", componentlink1description=Datasheet, componentlink1url=https://product.tdk.com/info/en/catalog/datasheets/mlcc_commercial_general_en.pdf?ref_disty=digikey, componentlink2description="DigiKey Link", componentlink2url=https://www.digikey.com/en/products/detail/tdk-corporation/C1608X5R1H105K080AB/2732903, Features="Low ESL", lastupdated="09/02/2024 20:10:02", Lifecycle Status=Active, Minimum Order=1, Mounting Type="Surface Mount, MLCC", Package / Case="0603 (1608 Metric)", packaging=TapeAndReel, Part Number=C1608X5R1H105K080AB, Part Status=Active, partid=36337, price=0.02, series=C, Size / Dimension="0.063\" L x 0.031\" W (1.60mm x 0.80mm)", Supplier 1=DigiKey, Thickness (Max)="0.035\" (0.90mm)"
C3 C6 C7 C10 C23 C28 C29 C30 C31 C32 C34 C35 C36 C37 C38 C39 C40 C41 C42 C43 C44: library part CGA3E2X7R1H104M080AE, "CAP CER 0.1UF 50V X7R 0603", Device Package="0603 (1608 Metric)", manufacturer="TDK Corporation", Operating Temperature="-55°C ~ 125°C", Ratings=AEC-Q200, Supplier Part Number 1=445-15958-1-ND, Temperature Coefficient=X7R, Tolerance=±20%, Voltage - Rated=50V, Applications="Automotive, Boardflex Sensitive", Capacitance="0.1 µF", componentlink1description=Datasheet, componentlink1url=https://product.tdk.com/info/en/catalog/datasheets/mlcc_automotive_soft_en.pdf?ref_disty=digikey, componentlink2description="DigiKey Link", componentlink2url=https://www.digikey.com/en/products/detail/tdk-corporation/CGA3E2X7R1H104M080AE/4490595, Features="Soft Termination", lastupdated="09/02/2024 20:10:15", Lifecycle Status=Active, Minimum Order=1, Mounting Type="Surface Mount, MLCC", Package / Case="0603 (1608 Metric)", packaging=TapeAndReel, Part Number=CGA3E2X7R1H104M080AE, Part Status=Active, partid=13634, price=0.03, series=CGA, Size / Dimension="0.063\" L x 0.031\" W (1.60mm x 0.80mm)", Supplier 1=DigiKey, Thickness (Max)="0.037\" (0.95mm)"
C14 C16 C18 C20 C22: library part CC0603GRNPO8BN102, "CAP CER 1000PF 25V C0G/NPO 0603", Device Package="0603 (1608 Metric)", manufacturer=Yageo, Operating Temperature="-55°C ~ 125°C", Supplier Part Number 1=311-3914-1-ND, Temperature Coefficient="C0G, NP0", Tolerance=±2%, Voltage - Rated=25V, Applications="General Purpose", Capacitance="1000 pF", componentlink1description=Datasheet, componentlink1url=https://www.yageo.com/upload/media/product/productsearch/datasheet/mlcc/UPY-GP_NP0_16V-to-50V_17.pdf, componentlink2description="DigiKey Link", componentlink2url=https://www.digikey.com/en/products/detail/yageo/CC0603GRNPO8BN102/5883535, lastupdated="09/02/2024 20:10:07", Lifecycle Status=Active, Minimum Order=1, Mounting Type="Surface Mount, MLCC", Package / Case="0603 (1608 Metric)", packaging=TapeAndReel, Part Number=CC0603GRNPO8BN102, Part Status=Active, partid=17388, price=0.02, series=CC, Size / Dimension="0.063\" L x 0.031\" W (1.60mm x 0.80mm)", Supplier 1=DigiKey, Thickness (Max)="0.035\" (0.90mm)"
C25: library part KGM15CS61E106MT, "CAP CER 10UF 25V X6S 0603", Device Package="0603 (1608 Metric)", manufacturer="KYOCERA AVX", Operating Temperature="-55°C ~ 105°C", Supplier Part Number 1=478-KGM15CS61E106MTCT-ND, Temperature Coefficient=X6S, Tolerance=±20%, Voltage - Rated=25V, Applications="General Purpose", Capacitance="10 µF", componentlink1description=Datasheet, componentlink1url=https://datasheets.kyocera-avx.com/x6s-dielectric.pdf, componentlink2description="DigiKey Link", componentlink2url=https://www.digikey.com/en/products/detail/kyocera-avx/KGM15CS61E106MT/16602925, lastupdated="09/02/2024 20:09:18", Lifecycle Status=Active, Minimum Order=1, Mounting Type="Surface Mount, MLCC", Package / Case="0603 (1608 Metric)", packaging=TapeAndReel, Part Number=KGM15CS61E106MT, Part Status=Active, partid=52144, price=0.06, series="KGM - X6S", Size / Dimension="0.063\" L x 0.031\" W (1.60mm x 0.80mm)", Supplier 1=DigiKey, Thickness (Max)="0.039\" (1.00mm)"
C27 C33: library part CC0603GRNPO9BN330, "CAP CER 33PF 50V C0G/NPO 0603", Device Package="0603 (1608 Metric)", manufacturer=Yageo, Operating Temperature="-55°C ~ 125°C", Supplier Part Number 1=311-3931-1-ND, Temperature Coefficient="C0G, NP0", Tolerance=±2%, Voltage - Rated=50V, Applications="General Purpose", Capacitance="33 pF", componentlink1description=Datasheet, componentlink1url=https://www.yageo.com/upload/media/product/productsearch/datasheet/mlcc/UPY-GP_NP0_16V-to-50V_17.pdf, componentlink2description="DigiKey Link", componentlink2url=https://www.digikey.com/en/products/detail/yageo/CC0603GRNPO9BN330/5883557, lastupdated="09/02/2024 20:10:23", Lifecycle Status=Active, Minimum Order=1, Mounting Type="Surface Mount, MLCC", Package / Case="0603 (1608 Metric)", packaging=TapeAndReel, Part Number=CC0603GRNPO9BN330, Part Status=Active, partid=8045, price=0.01, series=CC, Size / Dimension="0.063\" L x 0.031\" W (1.60mm x 0.80mm)", Supplier 1=DigiKey, Thickness (Max)="0.035\" (0.90mm)"
D1: library part CMP-04985-000003-1, "TVS DIODE 5.5V 15V 6SOT", Ambient Temperature Range High=+125°C, Ambient Temperature Range Low=-40°C, Breakdown Voltage=7V, Clamping Voltage=15V, manufacturer="Texas Instruments", Package=DRL0006A, Peak Pulse Current=2.5A, Peak Pulse Power=35W, Reverse Standoff Voltage=5.5V, Temperature="-40°C to +125°C", Automotive=No, Category=Diode, componentlink2description=Datasheet, componentlink2url=http://www.ti.com/lit/ds/symlink/tpd2e1b06.pdf, Device Class L1="Circuit Protection", Device Class L2="ESD and Circuit Protection ICs", Device Class L3=unset, Digikey Description="TVS DIODE 5.5V 15V 6SOT", Direction=Bidirectional, Height=0.6mm, Interface=I2C,USB,LVDS,Other, Lead Free=Yes, Manufacturer Part Number=TPD2E1B06DRLR, Mouser Description="ESD Suppressors / TVS Diodes 2-CH system level ESD protect device", Number Of Channels=2, Octopart=https://octopart.com/tpd2e1b06drlr-texas+instruments-30488860, RoHS=TRUE, Standoff Height=0mm, Temperature Range High=+125°C, Temperature Range Low=-40°C
D2 D3 D4 D5 D6 D7 D8 D9: "2020 RGB LED(BUILT-IN IC)", Package=None, Check_prices=https://www.snapeda.com/parts/XL-2020RGBC-WS2812B/Xinglight/view-part/?ref=eda, MF=XINGLIGHT, MP=XL-2020RGBC-WS2812B, SnapEDA_Link=https://www.snapeda.com/parts/XL-2020RGBC-WS2812B/Xinglight/view-part/?ref=snap
J1: library part CMP-196119-000001-2, "CONN RCPT USB2.0 TYPE C 24POS RA", Contact Material="Copper Alloy", Contact Plating=Gold, Gender=Receptacle, Number of Positions=16, Orientation="Right Angle", USB Standard="USB 2.0"
J2 J3 J5: library part CMP-77940-000004-1, "PIN HEADER, THR, DUAL ROW, .100\""
J4: "CONN HEADER R/A 10POS 2.54MM", Current Rating (Amps)="3A per Contact", Insulation Color=Black, manufacturer="Harwin Inc.", Material Flammability Rating="UL94 V-0", Operating Temperature="-40°C ~ 105°C", Supplier Part Number 1=952-3274-ND, componentlink1description=Datasheet, componentlink1url=https://cdn.harwin.com/pdfs/Harwin_PC_Connectors_M20.pdf, componentlink2description="DigiKey Link", componentlink2url=https://www.digikey.com/en/products/detail/harwin-inc/M20-9740542/3920716, Connector Type="Header, Cuttable", Contact Finish - Mating=Gold, Contact Finish - Post=Tin, Contact Length - Mating="0.228\" (5.80mm)", Contact Length - Post="0.118\" (3.00mm)", Contact Material=Brass, Contact Shape=Square, Contact Type="Male Pin", Fastening Type=Push-Pull, Insulation Height="0.200\" (5.08mm)", Insulation Material="Polyamide (PA6T), Nylon 6T", lastupdated="21/09/2022 19:18:08", Lifecycle Status=Active, Minimum Order=1, Mounting Type="Through Hole, Right Angle", Number of Positions=10, Number of Positions Loaded=All, Number of Rows=2, packaging=Bulk, Part Number=M20-9740542, Part Status=Active, partid=158, Pitch - Mating="0.100\" (2.54mm)", price=0.24, Row Spacing - Mating="0.100\" (2.54mm)", series=M20, Shrouding=Unshrouded, Style="Board to Board or Cable", Supplier 1=DigiKey, Termination=Solder
P1 P2: library part CMP-1502-01746-3, "Terminal Block, R/A Header, 5Pos, Th Rohs Compliant: Yes", Color=Green, Current=12A, Max Operating Temperature=105°C, Min Operating Temperature=-40°C, Voltage=300V, Contact Plating=Tin, Gender=Male, Lead Pitch=2.5mm, Mount="Through Hole", Number of Levels=1, Number of Pins=5, Number of Positions=5, Number of Positions Per Level=5, packaging=Box, Pitch=2.4892mm, RoHS=Compliant, Termination=Solder
R1 R2: library part ERJ-8BWJR050V, "RES 0.05 OHM 5% 1W 1206", Device Package="1206 (3216 Metric)", manufacturer="Panasonic Electronic Components", Operating Temperature="-55°C ~ 155°C", Power (Watts)=1W, Ratings=AEC-Q200, Supplier Device Package=1206, Supplier Part Number 1=P17694CT-ND, Temperature Coefficient="0/ +100ppm/°C", Tolerance=±5%, componentlink1description=Datasheet, componentlink1url=https://industrial.panasonic.com/cdbs/www-data/pdf/RDN0000/AOA0000C313.pdf, componentlink2description="DigiKey Link", componentlink2url=https://www.digikey.com/en/products/detail/panasonic-electronic-components/ERJ-8BWJR050V/5647727, Composition="Thick Film", Features="Automotive AEC-Q200, Current Sense", Height - Seated (Max)="0.030\" (0.75mm)", lastupdated="03/06/2024 19:49:36", Lifecycle Status=Active, Minimum Order=1, Number of Terminations=2, Package / Case="1206 (3216 Metric)", packaging=TapeAndReel, Part Number=ERJ-8BWJR050V, Part Status=Active, partid=2335, price=0.11, Resistance="50 mOhms", series=ERJ-8BW, Size / Dimension="0.126\" L x 0.063\" W (3.20mm x 1.60mm)", Supplier 1=DigiKey
R3 R4 R7 R8 R12: library part SG73P1JTTD1003F, "RES 100K OHM 1% 1/3W 0603", Device Package="0603 (1608 Metric)", manufacturer="KOA Speer Electronics, Inc.", Operating Temperature="-55°C ~ 155°C", Power (Watts)="0.333W, 1/3W", Ratings=AEC-Q200, Supplier Device Package=0603, Supplier Part Number 1=2019-SG73P1JTTD1003FCT-ND, Temperature Coefficient=±100ppm/°C, Tolerance=±1%, componentlink1description=Datasheet, componentlink1url=https://www.koaspeer.com/pdfs/SG73P.pdf, componentlink2description="DigiKey Link", componentlink2url=https://www.digikey.com/en/products/detail/koa-speer-electronics-inc/SG73P1JTTD1003F/10188341, Composition="Thick Film", Features="Automotive AEC-Q200, Pulse Withstanding", Height - Seated (Max)="0.022\" (0.55mm)", lastupdated="09/02/2024 20:40:28", Lifecycle Status=Active, Minimum Order=1, Number of Terminations=2, Package / Case="0603 (1608 Metric)", packaging=TapeAndReel, Part Number=SG73P1JTTD1003F, partid=83707, price=0.01, Resistance="100 kOhms", series=SG73P, Size / Dimension="0.063\" L x 0.031\" W (1.60mm x 0.80mm)", Supplier 1=DigiKey
R5 R6: library part ERJ-3EKF5621V, "RES SMD 5.62K OHM 1% 1/10W 0603", Device Package="0603 (1608 Metric)", manufacturer="Panasonic Electronic Components", Operating Temperature="-55°C ~ 155°C", Power (Watts)="0.1W, 1/10W", Ratings=AEC-Q200, Supplier Device Package=0603, Supplier Part Number 1=P5.62KHCT-ND, Temperature Coefficient=±100ppm/°C, Tolerance=±1%, componentlink1description=Datasheet, componentlink1url=https://industrial.panasonic.com/cdbs/www-data/pdf/RDA0000/AOA0000C304.pdf, componentlink2description="DigiKey Link", componentlink2url=https://www.digikey.com/en/products/detail/panasonic-electronic-components/ERJ-3EKF5621V/196387, Composition="Thick Film", Features="Automotive AEC-Q200", Height - Seated (Max)="0.022\" (0.55mm)", lastupdated="09/02/2024 20:41:56", Lifecycle Status=Active, Minimum Order=1, Number of Terminations=2, Package / Case="0603 (1608 Metric)", packaging=TapeAndReel, Part Number=ERJ-3EKF5621V, Part Status=Active, partid=26114, price=0.01, Resistance="5.62 kOhms", series=ERJ-3EK, Size / Dimension="0.063\" L x 0.031\" W (1.60mm x 0.80mm)", Supplier 1=DigiKey
R9 R10: library part RN73R1JTTD4172F10, "RES 41.7K OHM 1% 1/10W 0603", Device Package="0603 (1608 Metric)", manufacturer="KOA Speer Electronics, Inc.", Operating Temperature="-55°C ~ 155°C", Power (Watts)="0.1W, 1/10W", Ratings=AEC-Q200, Supplier Device Package=0603, Supplier Part Number 1=2019-RN73R1JTTD4172F10CT-ND, Temperature Coefficient=±10ppm/°C, Tolerance=±1%, componentlink1description=Datasheet, componentlink1url=https://media.digikey.com/pdf/Data%20Sheets/KOA%20Speer/RN73R_Type_DS.pdf, componentlink2description="DigiKey Link", componentlink2url=https://www.digikey.com/en/products/detail/koa-speer-electronics-inc/RN73R1JTTD4172F10/10017113, Composition="Thin Film", Features="Automotive AEC-Q200, Moisture Resistant", Height - Seated (Max)="0.022\" (0.55mm)", lastupdated="09/02/2024 20:41:25", Lifecycle Status=Active, Minimum Order=1, Number of Terminations=2, Package / Case="0603 (1608 Metric)", packaging=TapeAndReel, Part Number=RN73R1JTTD4172F10, Part Status=Active, partid=62816, price=0.08, Resistance="41.7 kOhms", series=RN73R, Size / Dimension="0.063\" L x 0.031\" W (1.60mm x 0.80mm)", Supplier 1=DigiKey
R11 R19: library part CRCW060334K8FKEA, "RES SMD 34.8K OHM 1% 1/10W 0603", Device Package="0603 (1608 Metric)", manufacturer="Vishay Dale", Operating Temperature="-55°C ~ 155°C", Power (Watts)="0.1W, 1/10W", Ratings=AEC-Q200, Supplier Device Package=0603, Supplier Part Number 1=541-34.8KHCT-ND, Temperature Coefficient=±100ppm/°C, Tolerance=±1%, componentlink1description=Datasheet, componentlink1url=http://www.vishay.com/docs/20035/dcrcwe3.pdf, componentlink2description="DigiKey Link", componentlink2url=https://www.digikey.com/en/products/detail/vishay-dale/CRCW060334K8FKEA/1174842, Composition="Thick Film", Features="Automotive AEC-Q200", Height - Seated (Max)="0.020\" (0.50mm)", lastupdated="09/02/2024 20:43:05", Lifecycle Status=Active, Minimum Order=1, Number of Terminations=2, Package / Case="0603 (1608 Metric)", packaging=TapeAndReel, Part Number=CRCW060334K8FKEA, Part Status=Active, partid=12662, price=0.01, Resistance="34.8 kOhms", series=CRCW, Size / Dimension="0.061\" L x 0.033\" W (1.55mm x 0.85mm)", Supplier 1=DigiKey
R13: library part MCT0603MZ0000ZP500, "RES 0 OHM JUMPER 1/8W 0603", Device Package="0603 (1608 Metric)", manufacturer="Vishay Beyschlag", Operating Temperature="-55°C ~ 155°C", Power (Watts)="0.125W, 1/8W", Ratings=AEC-Q200, Supplier Device Package=0603, Supplier Part Number 1=749-1745-1-ND, Tolerance=Jumper, componentlink1description=Datasheet, componentlink1url=http://www.vishay.com/docs/28760/mcat_pro.pdf, componentlink2description="DigiKey Link", componentlink2url=http://digikey.com/product-detail/en/vishay-beyschlag/MCT0603MZ0000ZP500/749-1745-1-ND/7348053, Composition="Thin Film", Features="Anti-Sulfur, Automotive AEC-Q200", Height - Seated (Max)="0.022\" (0.55mm)", lastupdated="14/02/2022 15:05:22", Lifecycle Status=Active, Minimum Order=1, Number of Terminations=2, Package / Case="0603 (1608 Metric)", packaging=TapeAndReel, Part Number=MCT0603MZ0000ZP500, Part Status=Active, partid=10258, price=0.04, series="MCT AT - Professional", Size / Dimension="0.061\" L x 0.033\" W (1.55mm x 0.85mm)", Supplier 1=DigiKey
R14 R18: library part AC0603FR-07154KL, "RES SMD 154K OHM 1% 1/10W 0603", Device Package="0603 (1608 Metric)", manufacturer=Yageo, Operating Temperature="-55°C ~ 155°C", Power (Watts)="0.1W, 1/10W", Ratings=AEC-Q200, Supplier Device Package=0603, Supplier Part Number 1=13-AC0603FR-07154KLCT-ND, Temperature Coefficient=±100ppm/°C, Tolerance=±1%, componentlink1description=Datasheet, componentlink1url=https://media.digikey.com/pdf/Data%20Sheets/Yageo%20PDFs/AC%20Series,%20Automotive.pdf, componentlink2description="DigiKey Link", componentlink2url=https://www.digikey.com/en/products/detail/yageo/AC0603FR-07154KL/5895797, Composition="Thick Film", Features="Automotive AEC-Q200, Moisture Resistant", Height - Seated (Max)="0.022\" (0.55mm)", lastupdated="09/02/2024 20:40:39", Lifecycle Status=Active, Minimum Order=1, Number of Terminations=2, Package / Case="0603 (1608 Metric)", packaging=CutTape, Part Number=AC0603FR-07154KL, partid=79462, price=0.01, Resistance="154 kOhms", series=AC, Size / Dimension="0.063\" L x 0.031\" W (1.60mm x 0.80mm)", Supplier 1=DigiKey
R15 R20: library part CRCW06036K98FKEA, "RES SMD 6.98K OHM 1% 1/10W 0603", Device Package="0603 (1608 Metric)", manufacturer="Vishay Dale", Operating Temperature="-55°C ~ 155°C", Power (Watts)="0.1W, 1/10W", Ratings=AEC-Q200, Supplier Device Package=0603, Supplier Part Number 1=541-6.98KHCT-ND, Temperature Coefficient=±100ppm/°C, Tolerance=±1%, componentlink1description=Datasheet, componentlink1url=http://www.vishay.com/docs/20035/dcrcwe3.pdf, componentlink2description="DigiKey Link", componentlink2url=https://www.digikey.com/en/products/detail/vishay-dale/CRCW06036K98FKEA/1174765, Composition="Thick Film", Features="Automotive AEC-Q200", Height - Seated (Max)="0.020\" (0.50mm)", lastupdated="09/02/2024 20:43:25", Lifecycle Status=Active, Minimum Order=1, Number of Terminations=2, Package / Case="0603 (1608 Metric)", packaging=TapeAndReel, Part Number=CRCW06036K98FKEA, Part Status=Active, partid=7857, price=0.01, Resistance="6.98 kOhms", series=CRCW, Size / Dimension="0.061\" L x 0.033\" W (1.55mm x 0.85mm)", Supplier 1=DigiKey
R16 R17: library part RC0603FR-0744K2L, "RES 44.2K OHM 1% 1/10W 0603", Device Package="0603 (1608 Metric)", manufacturer=Yageo, Operating Temperature="-55°C ~ 155°C", Power (Watts)="0.1W, 1/10W", Supplier Device Package=0603, Supplier Part Number 1=311-44.2KHRCT-ND, Temperature Coefficient=±100ppm/°C, Tolerance=±1%, componentlink1description=Datasheet, componentlink1url=https://www.yageo.com/upload/media/product/productsearch/datasheet/rchip/PYu-RC_Group_51_RoHS_L_10.pdf, componentlink2description="DigiKey Link", componentlink2url=https://www.digikey.com/en/products/detail/yageo/RC0603FR-0744K2L/727241, Composition="Thick Film", Features="Moisture Resistant", Height - Seated (Max)="0.022\" (0.55mm)", lastupdated="09/02/2024 20:43:25", Lifecycle Status=Active, Minimum Order=1, Number of Terminations=2, Package / Case="0603 (1608 Metric)", packaging=CutTape, Part Number=RC0603FR-0744K2L, Part Status=Active, partid=7751, price=0.01, Resistance="44.2 kOhms", series=RC_L, Size / Dimension="0.063\" L x 0.031\" W (1.60mm x 0.80mm)", Supplier 1=DigiKey
R21 R26 R28 R29 R30 R33 R34 R35: library part SG73S1JTTD1002F, "RES 10K OHM 1% 1/5W 0603", Device Package="0603 (1608 Metric)", manufacturer="KOA Speer Electronics, Inc.", Operating Temperature="-55°C ~ 155°C", Power (Watts)="0.2W, 1/5W", Ratings=AEC-Q200, Supplier Device Package=0603, Supplier Part Number 1=2019-SG73S1JTTD1002FCT-ND, Temperature Coefficient=±100ppm/°C, Tolerance=±1%, componentlink1description=Datasheet, componentlink1url=http://www.koaspeer.com/catimages/Products/SG73S/SG73S.pdf, componentlink2description="DigiKey Link", componentlink2url=https://www.digikey.com/en/products/detail/koa-speer-electronics-inc/SG73S1JTTD1002F/10279969, Composition="Thick Film", Features="Automotive AEC-Q200, Moisture Resistant, Pulse Withstanding", Height - Seated (Max)="0.022\" (0.55mm)", lastupdated="09/02/2024 20:43:35", Lifecycle Status=Active, Minimum Order=1, Number of Terminations=2, Package / Case="0603 (1608 Metric)", packaging=TapeAndReel, Part Number=SG73S1JTTD1002F, Part Status=Active, partid=5386, price=0.01, Resistance="10 kOhms", series=SG73S, Size / Dimension="0.063\" L x 0.031\" W (1.60mm x 0.80mm)", Supplier 1=DigiKey
R22: library part ERJ-PA3J102V, "RES SMD 1K OHM 5% 1/3W 0603", Device Package="0603 (1608 Metric)", manufacturer="Panasonic Electronic Components", Operating Temperature="-55°C ~ 155°C", Power (Watts)="0.333W, 1/3W", Ratings=AEC-Q200, Supplier Device Package=0603, Supplier Part Number 1=P1KBZCT-ND, Temperature Coefficient=±200ppm/°C, Tolerance=±5%, componentlink1description=Datasheet, componentlink1url=https://industrial.panasonic.com/cdbs/www-data/pdf/RDO0000/AOA0000C331.pdf, componentlink2description="DigiKey Link", componentlink2url=https://www.digikey.com/en/products/detail/panasonic-electronic-components/ERJ-PA3J102V/5035970, Composition="Thick Film", Features="Automotive AEC-Q200, Pulse Withstanding", Height - Seated (Max)="0.022\" (0.55mm)", lastupdated="09/02/2024 20:42:47", Lifecycle Status=Active, Minimum Order=1, Number of Terminations=2, Package / Case="0603 (1608 Metric)", packaging=TapeAndReel, Part Number=ERJ-PA3J102V, Part Status=Active, partid=17507, price=0.01, Resistance="1 kOhms", series=ERJ-PA3, Size / Dimension="0.063\" L x 0.031\" W (1.60mm x 0.80mm)", Supplier 1=DigiKey
R23 R24: library part CRCW060327R0FKEA, "RES SMD 27 OHM 1% 1/10W 0603", Device Package="0603 (1608 Metric)", manufacturer="Vishay Dale", Operating Temperature="-55°C ~ 155°C", Power (Watts)="0.1W, 1/10W", Ratings=AEC-Q200, Supplier Device Package=0603, Supplier Part Number 1=541-27.0HCT-ND, Temperature Coefficient=±100ppm/°C, Tolerance=±1%, componentlink1description=Datasheet, componentlink1url=http://www.vishay.com/docs/20035/dcrcwe3.pdf, componentlink2description="DigiKey Link", componentlink2url=https://www.digikey.com/en/products/detail/vishay-dale/CRCW060327R0FKEA/1174487, Composition="Thick Film", Features="Automotive AEC-Q200", Height - Seated (Max)="0.020\" (0.50mm)", lastupdated="09/02/2024 20:43:24", Lifecycle Status=Active, Minimum Order=1, Number of Terminations=2, Package / Case="0603 (1608 Metric)", packaging=TapeAndReel, Part Number=CRCW060327R0FKEA, Part Status=Active, partid=8035, price=0.01, Resistance="27 Ohms", series=CRCW, Size / Dimension="0.061\" L x 0.033\" W (1.55mm x 0.85mm)", Supplier 1=DigiKey
R25 R27: library part RMCF0603FT5K10, "RES 5.1K OHM 1% 1/10W 0603", Device Package="0603 (1608 Metric)", manufacturer="Stackpole Electronics Inc", Operating Temperature="-55°C ~ 155°C", Power (Watts)="0.1W, 1/10W", Ratings=AEC-Q200, Supplier Device Package=0603, Supplier Part Number 1=RMCF0603FT5K10CT-ND, Temperature Coefficient=±100ppm/°C, Tolerance=±1%, componentlink1description=Datasheet, componentlink1url=https://www.seielect.com/catalog/sei-rmcf_rmcp.pdf, componentlink2description="DigiKey Link", componentlink2url=https://www.digikey.com/en/products/detail/stackpole-electronics-inc/RMCF0603FT5K10/1760908, Composition="Thick Film", Features="Automotive AEC-Q200", Height - Seated (Max)="0.022\" (0.55mm)", lastupdated="09/02/2024 20:43:14", Lifecycle Status=Active, Minimum Order=1, Number of Terminations=2, Package / Case="0603 (1608 Metric)", packaging=CutTape, Part Number=RMCF0603FT5K10, Part Status=Active, partid=10617, price=0.01, Resistance="5.1 kOhms", series=RMCF, Size / Dimension="0.061\" L x 0.031\" W (1.55mm x 0.80mm)", Supplier 1=DigiKey
R31 R32: library part CRCW0603110KFKEA, "RES SMD 110K OHM 1% 1/10W 0603", Device Package="0603 (1608 Metric)", manufacturer="Vishay Dale", Operating Temperature="-55°C ~ 155°C", Power (Watts)="0.1W, 1/10W", Ratings=AEC-Q200, Supplier Device Package=0603, Supplier Part Number 1=541-110KHCT-ND, Temperature Coefficient=±100ppm/°C, Tolerance=±1%, componentlink1description=Datasheet, componentlink1url=http://www.vishay.com/docs/20035/dcrcwe3.pdf, componentlink2description="DigiKey Link", componentlink2url=https://www.digikey.com/en/products/detail/vishay-dale/CRCW0603110KFKEA/1174900, Composition="Thick Film", Features="Automotive AEC-Q200", Height - Seated (Max)="0.020\" (0.50mm)", lastupdated="09/02/2024 20:43:25", Lifecycle Status=Active, Minimum Order=1, Number of Terminations=2, Package / Case="0603 (1608 Metric)", packaging=TapeAndReel, Part Number=CRCW0603110KFKEA, Part Status=Active, partid=7799, price=0.01, Resistance="110 kOhms", series=CRCW, Size / Dimension="0.061\" L x 0.033\" W (1.55mm x 0.85mm)", Supplier 1=DigiKey
R36: library part CRCW06031K00FKTA, "RES SMD 1K OHM 1% 1/10W 0603", Device Package="0603 (1608 Metric)", manufacturer="Vishay Dale", Operating Temperature="-55°C ~ 155°C", Power (Watts)="0.1W, 1/10W", Ratings=AEC-Q200, Supplier Device Package=0603, Supplier Part Number 1=541-2987-1-ND, Temperature Coefficient=±100ppm/°C, Tolerance=±1%, componentlink1description=Datasheet, componentlink1url=http://www.vishay.com/docs/20008/dcrcw.pdf, componentlink2description="DigiKey Link", componentlink2url=https://www.digikey.com/en/products/detail/vishay-dale/CRCW06031K00FKTA/1221746, Composition="Thick Film", Features="Automotive AEC-Q200", Height - Seated (Max)="0.020\" (0.50mm)", lastupdated="09/02/2024 20:42:47", Lifecycle Status=Active, Minimum Order=1, Number of Terminations=2, Package / Case="0603 (1608 Metric)", packaging=TapeAndReel, Part Number=CRCW06031K00FKTA, Part Status=Active, partid=17528, price=0.01, Resistance="1 kOhms", series=CRCW, Size / Dimension="0.063\" L x 0.033\" W (1.60mm x 0.85mm)", Supplier 1=DigiKey
U1 U2: library part CMP-09139-000213-1, "36VIN, 1.5A BUCK-BOOST UMODULE"
U3 U5: "1-A, low-IQ, high-accuracy, adjustable ultra-low-dropout voltage regulator with power good & enable", Package="WSON-6 Texas Instruments", Check_prices=https://www.snapeda.com/parts/TPS74601PDRVT/Texas+Instruments/view-part/?ref=eda, MF="Texas Instruments", MP=TPS74601PDRVT, SnapEDA_Link=https://www.snapeda.com/parts/TPS74601PDRVT/Texas+Instruments/view-part/?ref=snap
U4: library part DS4424, "Two-/Four-Channel, IÂ²C, 7-Bit Sink/Source Current DAC", Manufacturer_Name="Analog Devices Inc", Manufacturer_Part_Number=ds4424n+, Copyright="Copyright (C) 2026 Ultra Librarian. All rights reserved.", RefDes=RefDes, Type=Type
U6: library part CMP-78876-000009-2, "IC FLASH 16MBIT SPI/QUAD 8SOIC", Ambient Temperature Range High=85°C, Max Supply Voltage=3.6V, Min Operating Temperature=-40°C, Min Supply Voltage=2.7V, Access Time=5ms, Height=1.75mm, Interface=SPI, Max Operating Temperature=85°C, Memory Size=2MB, Memory Type=FLASH, NexarPartId=75645707, RoHS=Non-Compliant, Schedule B="8542320070, 8542320070"
U7: "RP2040 chip for Raspberry Pi Pico - ARM® Cortex®-M0+ MCU 32-Bit", Package=None, Check_prices=https://www.snapeda.com/parts/RP2040/Raspberry+Pi/view-part/?ref=eda, MF="Raspberry Pi", MP=RP2040, SnapEDA_Link=https://www.snapeda.com/parts/RP2040/Raspberry+Pi/view-part/?ref=snap
U8: library part CMP-2000-04956-2, "IC TRNSLTR BIDIRECTIONAL 20TSSOP", Case/Package=TSSOP, High Level Output Current=-50mA, Low Level Output Current=50mA, Max Operating Temperature=85°C, Max Supply Voltage=5.5V, Min Operating Temperature=-40°C, Min Supply Voltage=1.2V, Nominal Supply Current=8uA, Output Current=620uA, Package Quantity=1, Quiescent Current=3uA, Supplier Part Number 1=296-TXS0108WQPWRQ1TR-ND, Contact Plating=Gold, Data Rate=60Mbps, Height=1.15mm, Lead Free="Lead Free", Length=6.5mm, Logic Function=Translator, Mount="Surface Mount", Number of Bits=8, Number Of Channels=8, Number of Inputs=8, Number of Pins=20, Output Type=Voltage, packaging="Tape and Reel", Propagation Delay=4.8ns, Radiation Hardening=No, REACH SVHC="No SVHC", Rise Time=6.3ns, RoHS Compliant=Yes, series=-, Supplier 1=DigiKey, Supply Current=8uA, Termination=SMD/SMT, Turn-On Delay Time=312ns, Weight=0.002716oz, Width=4.4mm
U9: library part CMP-04899-000027-1, "IC TRNSLTR BIDIRECTIONAL 24TSSOP", Ambient Temperature Range High=+85°C, Ambient Temperature Range Low=-40°C, manufacturer="Texas Instruments", Max Supply Voltage=5.5V, Min Supply Voltage=1.65V, Nominal Supply Current=25uA, Package=PW0024A, Temperature="-40°C to +85°C", Automotive=No, Category=IC, componentlink2description=Datasheet, componentlink2url=http://www.ti.com/lit/ds/symlink/sn74lvc8t245.pdf, Device Class L1="Integrated Circuits (ICs)", Device Class L2="Logic ICs", Device Class L3="Voltage Level Shifters", Digikey Description="IC TRNSLTR BIDIRECTIONAL 24TSSOP", Height=1.2mm, Ipc Land Pattern Name=SOP65P640X120-24, Lead Free=Yes, Logic Function Desc=Non-Inverting, Manufacturer Part Number=SN74LVC8T245PWR, Mouser Description="Translation - Voltage Levels 8-Bit Dual-Supply Bus Xcvr", Number Of Circuits=1, Number of Inputs=8, Number Of Outputs=8, Octopart=https://octopart.com/sn74lvc8t245pwr-texas+instruments-517164, Propagation Delay=4.3ns, RoHS=TRUE, Standoff Height=0.05mm, Temperature Range High=+85°C, Temperature Range Low=-40°C, V A Max=5.5V, V A Min=1.65V, V B Max=5.5V, V B Min=1.65V
Y1: library part CMP-27762-006596-1, "Crystal 12MHz ±10ppm 20pF SMD-4 3.2mm x 2.5mm"

## Free pads (board coordinates)
  round 5 hole 3.3 mask+0: 1(4,76) 2(4,4) 3(106,4) 4(106,76)

## Via types
v1: diameter 0.45, hole 0.2, Top Layer to Bottom Layer, tented both sides, 1540 vias

## Nets (pads, with @x,y where several pads share a name; then routed paths per layer and width w, separated by ;. In a path a pad name is that pad's centre, name@x,y a point inside that pad or via, vN(x,y) a via of type N, cw(c..) or ccw(c..) an arc to the next point about the centre after c; other vN are vias at no path point)
1V1: C26.2 U7.23 U7.45 U7.50 | length 12.7
  Top Layer w0.2: C26.2@27.925,40.25 28.275,40.6 28.275,40.675 28.7,41.1 U7.45@28.7,41.815 28.7,43 ; U7.23@29.9,48.685 29.9,47.517 29.783,47.4 28.9,47.4 28.6,47.1 28.6,43.1 28.7,43 ; U7.50@30.7,41.815 30.7,42.4 30.5,42.6 29.1,42.6 28.7,43